# Altium PCB RXTX42_ver.0.0.PcbDoc
Units mm, origin at the board's own origin, x right, y up, seen from the top; angles counter-clockwise.
Board outline 50 x 75 mm, 8 copper layers (Top Layer, Int1 (Sign), Int2 (GND), Int3 (Sign), Int4 (Sign), Int5 (PWR), Int6 (Sign), Bottom Layer), stack 1.598 mm thick; 181 components, 144 nets, 699 pads, 127 vias.
Unrouted connection lines stored in the file: 446.
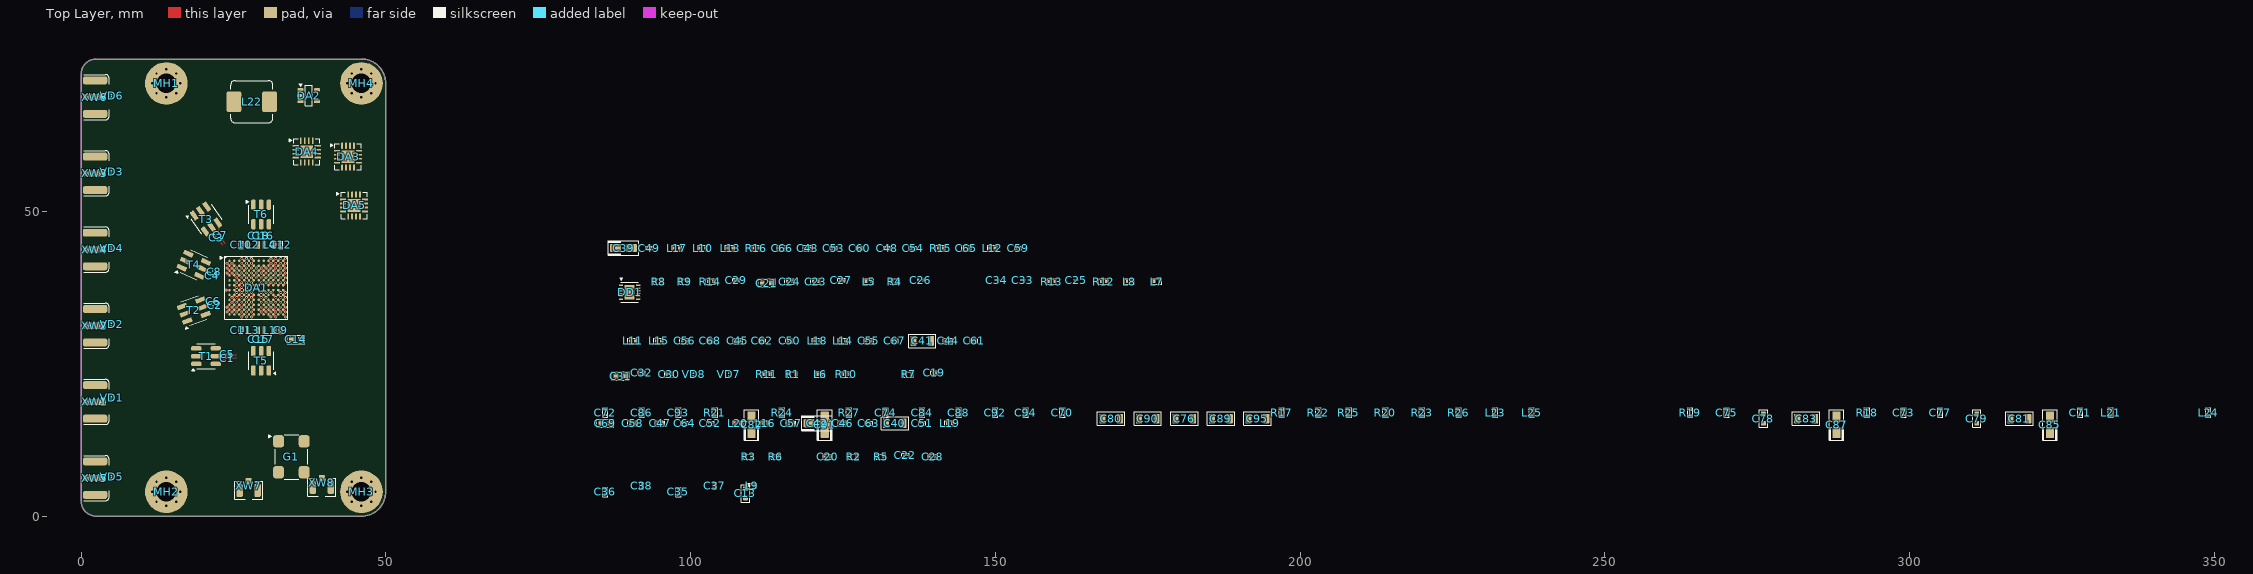
[diagram p0: Top Layer view]
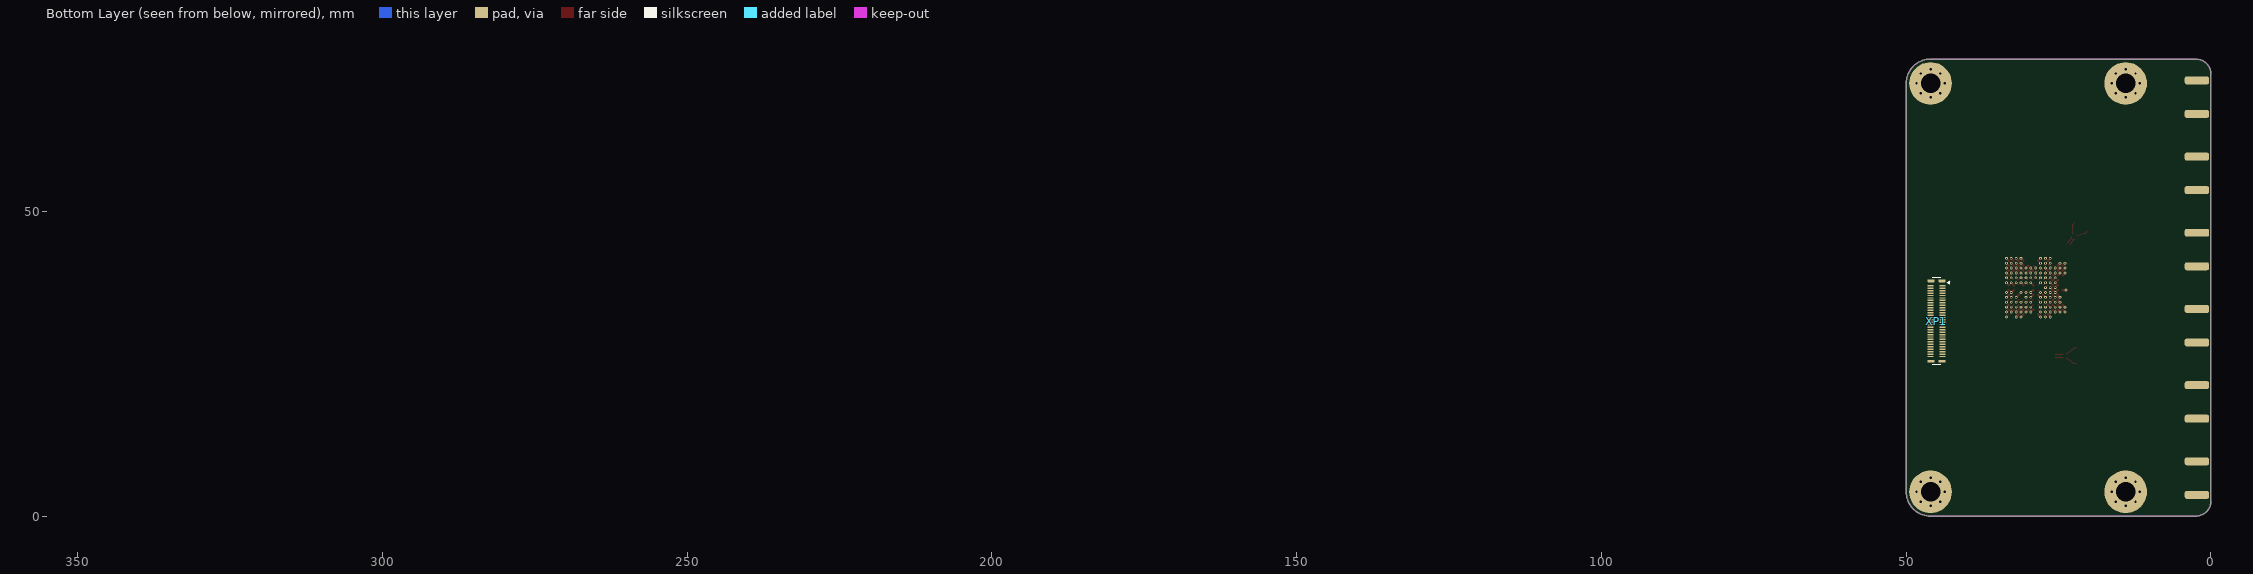
[diagram p1: Bottom Layer view, seen from below]

## Layer stack, top to bottom
Top Solder: solder mask 0.025, SM-001, Dk 3.5
Top Layer: signal copper 0.045
Dielectric 1: prepreg 0.125, PP-006, Dk 3.9
Int1 (Sign): signal copper 0.018
Dielectric 3: core 0.3, Core-027, Dk 4.2
Int2 (GND): signal copper 0.018
Dielectric 5: prepreg 0.125, PP-006, Dk 4.1
Int3 (Sign): signal copper 0.018
Dielectric 6: core 0.3, Core-027, Dk 4.2
Int4 (Sign): signal copper 0.018
Dielectric 7: prepreg 0.125, PP-006, Dk 4.1
Int5 (PWR): signal copper 0.018
Dielectric 9: core 0.3, Core-027, Dk 4.2
Int6 (Sign): signal copper 0.018
Dielectric 11: prepreg 0.125, PP-006, Dk 3.9
Bottom Layer: signal copper 0.045
Bottom Solder: solder mask 0.025, SM-001, Dk 3.5

## Board outline
-0.004,2.504 -0.004,72.5 cw(c2.496,72.5) 2.496,75 45.996,75 cw(c45.996,71) 49.996,71 49.996,4 cw(c45.996,4) 45.996,0 2.5,0 cw(c2.5,2.504)

## Design rules (kind name [scope] priority, off if disabled: settings)
BoardOutlineClearance [All] p1: gap=0.5 ignorepadtopadclearanceinfootprint=FALSE
Clearance [All] p1: gap=0.1 ignorepadtopadclearanceinfootprint=FALSE except(0.2: Arc-Hole Track-Hole SMDPad-Hole THPad-Hole Via-Hole Fill-Hole Poly-Hole Region-Hole Text-Hole)
DiffPairsRouting DiffPairsRouting_D100R [InDifferentialPairClass('D100R')] p1: maxlimit=0.254 minlimit=0.127 mostfreqgap=0.254 toplayer_mingap=0.25 toplayer_maxgap=0.25 toplayer_prefgap=0.25 toplayer_minwidth=0.2 toplayer_maxwidth=0.2 toplayer_prefwidth=0.2 midlayer1_maxgap=0.127 midlayer1_prefgap=0.127 midlayer1_minwidth=0.094 midlayer1_maxwidth=0.094 midlayer1_prefwidth=0.094 midlayer2_maxgap=0.127 midlayer2_prefgap=0.127 midlayer2_minwidth=0.09 midlayer2_maxwidth=0.09 midlayer2_prefwidth=0.09 midlayer3_maxgap=0.127 midlayer3_prefgap=0.127 midlayer3_minwidth=0.09 midlayer3_maxwidth=0.09 midlayer3_prefwidth=0.09 midlayer4_maxgap=0.127 midlayer4_prefgap=0.127 midlayer4_minwidth=0.094 midlayer4_maxwidth=0.094 midlayer4_prefwidth=0.094 bottomlayer_mingap=0.25 bottomlayer_maxgap=0.25 bottomlayer_prefgap=0.25 bottomlayer_minwidth=0.2 bottomlayer_maxwidth=0.2 bottomlayer_prefwidth=0.2 impedanceprofiledriven=TRUE impedanceprofileid={1991C7B2-119B-427F-9B3B-41121354F150} impedanceprofilevalue=100.000000 maxuncoupledlength=12.7
PolygonConnect [All] p1: connectstyle=Relief reliefconductorwidth=0.254 reliefentries=4 polygonreliefangle="90 Angle" airgapwidth=0.254
RoutingVias [All] p1: holewidth=0.2 width=0.45 viastyle="Through Hole" minholewidth=0.2 minwidth=0.45 maxholewidth=0.2 maxwidth=0.45
SolderMaskExpansion SolderMaskExpansion_Via [IsVia] p1: expansion=0.102 istentingtop=TRUE
SolderMaskExpansion [All] p2: expansion=0.05 istentingtop=FALSE
Width Width_SC50R [InNetClass('RX') or InNetClass('TX')] p1: maxlimit=1 minlimit=0.125 preferedwidth=0.125 toplayer_minwidth=1 toplayer_prefwidth=1 midlayer1_minwidth=0.129 midlayer1_maxwidth=0.129 midlayer1_prefwidth=0.129 midlayer2_maxwidth=0.125 midlayer3_maxwidth=0.125 midlayer4_minwidth=0.129 midlayer4_maxwidth=0.129 midlayer4_prefwidth=0.129 midlayer5_maxwidth=0.125 midlayer6_maxwidth=0.125 bottomlayer_minwidth=1 bottomlayer_prefwidth=1 impedanceprofiledriven=TRUE impedanceprofileid={81B1EE76-4853-4AD2-9444-194ED3106A19} impedanceprofilevalue=50.000000 minimp=50.000000 maximp=50.000000 favimp=50.000000
Width [All] p2: maxlimit=10 minlimit=0.1 preferedwidth=0.15
29 further rules are at their usual default settings.

## Classes and differential pairs
net class RX: RX1_A RX1_B RX2_A RX2_B
net class TX: TX1_A TX2_A
net class TX_DATA: FB_CLK TX_D0 TX_D1 TX_D2 TX_D3 TX_D4 TX_D5 TX_D6 TX_D7 TX_D8 TX_D9 TX_D10 TX_D11 TX_FRAME
net class RX_DATA: DATA_CLK RX_D0 RX_D1 RX_D2 RX_D3 RX_D4 RX_D5 RX_D6 RX_D7 RX_D8 RX_D9 RX_D10 RX_D11 RX_FRAME
net class PWR: 1.3V_TX 1.3V_TX1B 1.3V_TX2B 1.3V_VDDA_BB 1.3V_VDDA_DIG 1.3V_VDDA_MISC 1.3V_VDDA_OSC 1.3V_VDDA_RX_LO 1.3V_VDDA_RX_SYNTH 1.3V_VDDA_RX_TX 1.3V_VDDA_RX_VCO 1.3V_VDDA_TX_LO 1.3V_VDDA_TX_SYNTH 1.3V_VDDA_TX_VCO 1.8V 1.8V_VDD_INTERFACE 3.3V_VDD_GPO
net class CTRL_OUT: CTRL_OUT0 CTRL_OUT1 CTRL_OUT2 CTRL_OUT3 CTRL_OUT4 CTRL_OUT5 CTRL_OUT6 CTRL_OUT7
net class CTRL_IN: CTRL_IN0 CTRL_IN1 CTRL_IN2 CTRL_IN3
component class Э3-2: C39 C40 C41 C42 C43 C44 C45 C46 C47 C48 C49 C50 C51 C52 C53 C54 C55 C56 C57 C58 C59 C60 C61 C62 C63 C64 C65 C66 C67 C68 C69 C70 C71 C72 C73 C74 C75 C76 C77 C78 C79 C80 C81 C82 C83 C84 C85 C86 C87 C88 C89 C90 C91 C92 C93 C94 C95 DA2 DA3 DA4 DA5 L11 L12 L13 L14 L15 L16 L17 L18 L19 L20 L21 L22 L23 L24 L25 MH1 MH2 MH3 MH4 R15 R16 R17 R18 R19 R20 R21 R22 R23 R24 R25 R26 R27 XP1
differential pair class D100R: RX1_A_AC RX1_A_DC RX1_B_AC RX1_B_DC RX2_A_AC RX2_A_DC RX2_B_AC RX2_B_DC RX_FRAME TX1_A_AC TX1_A_DC TX2_A_AC TX2_A_DC TX_FRAME
component class Э3-1: C1 C2 C3 C4 C5 C6 C7 C8 C9 C10 C11 C12 C13 C14 C15 C16 C17 C18 C19 C20 C21 C22 C23 C24 C25 C26 C27 C28 C29 C30 C31 C32 C33 C34 C35 C36 C37 C38 DA1 DD1 G1 L1 L2 L3 L4 L5 L6 L7 L8 L9 L10 R1 R2 R3 R4 R5 R6 R7 R8 R9 R10 R11 R12 R13 R14 T1 T2 T3 T4 T5 T6 VD1 VD2 VD3 VD4 VD5 VD6 VD7 VD8 XW1 XW2 XW3 XW4 XW5 XW6 XW7 XW8
differential pair TX2_A_DC: +TX2_A_DC_P -TX2_A_DC_N
differential pair TX2_A_AC: +TX2_A_AC_P -TX2_A_AC_N
differential pair TX1_A_DC: +TX1_A_DC_P -TX1_A_DC_N
differential pair TX1_A_AC: +TX1_A_AC_P -TX1_A_AC_N
differential pair RX2_B_DC: +RX2_B_DC_P -RX2_B_DC_N
differential pair RX2_B_AC: +RX2_B_AC_P -RX2_B_AC_N
differential pair RX2_A_DC: +RX2_A_DC_P -RX2_A_DC_N
differential pair RX2_A_AC: +RX2_A_AC_P -RX2_A_AC_N
differential pair RX1_B_DC: +RX1_B_DC_P -RX1_B_DC_N
differential pair RX1_B_AC: +RX1_B_AC_P -RX1_B_AC_N
differential pair RX1_A_DC: +RX1_A_DC_P -RX1_A_DC_N
differential pair RX1_A_AC: +RX1_A_AC_P -RX1_A_AC_N

## Components (designator, comment, footprint, x,y, rotation, side; value= is the part's Value field where it differs from the comment)
C1 "" C0201-B-0.3mm-NO 24,25.95 r0 top value=18
C2 "" C0201-B-0.3mm-NO 21.917,34.595 r20 top value=18
C3 "" C0201-B-0.3mm-NO 22.2,45.668 r305 top value=18
C4 "" C0201-B-0.3mm-NO 21.514,39.431 r335 top value=18
C5 "" C0201-B-0.3mm-NO 24,26.55 r0 top value=18
C6 "" C0201-B-0.3mm-NO 21.661,35.299 r20 top value=18
C7 "" C0201-B-0.3mm-NO 22.815,46.098 r305 top value=18
C8 "" C0201-B-0.3mm-NO 21.831,40.111 r335 top value=18
C9 "" C0201-B-0.3mm 32.8,30.5 r270 top value=1000
C10 "" C0201-B-0.3mm 26.3,44.5 r90 top value=1000
C11 "" C0201-B-0.3mm 26.3,30.5 r270 top value=1000
C12 "" C0201-B-0.3mm 32.8,44.5 r90 top value=1000
C13 "" C0603-B-0.8mm 108.999,3.749 r90 top value="10 мкФ"
C14 "" C0603-B-0.8mm 35.25,29 r180 top value="10 мкФ"
C15 "" C0201-B-0.3mm-NO 29.175,29 r90 top value=18
C16 "" C0201-B-0.3mm-NO 29.925,46 r270 top value=18
C17 "" C0201-B-0.3mm-NO 29.925,29 r90 top value=18
C18 "" C0201-B-0.3mm-NO 29.175,46 r270 top value=18
C19 "" C0201-B-0.3mm 139.999,23.499 r0 top value="0,01 мкФ"
C20 "" C0402-B-0.5mm 122.499,9.749 r0 top value="0,1 мкФ"
C21 "" C0603-B-0.8mm 112.499,38.249 r0 top value="10 мкФ"
C22 "" C0201-B-0.3mm 135.249,9.999 r0 top value="0,01 мкФ"
C23 "" C0402-B-0.5mm 120.499,38.499 r0 top value="0,1 мкФ"
C24 "" C0402-B-0.5mm 116.249,38.499 r0 top value="0,1 мкФ"
C25 "" C0201-B-0.3mm-NO 163.249,38.749 r0 top value=1000
C26 "" C0402-B-0.5mm-NO 137.749,38.749 r0 top value=47
C27 "" C0201-B-0.3mm 124.749,38.749 r0 top value=18
C28 "" C0402-B-0.5mm 139.749,9.749 r0 top value="0,1 мкФ"
C29 "" C0201-B-0.3mm 107.499,38.749 r0 top value=18
C30 "" C0402-B-0.5mm 96.499,23.249 r0 top value="0,1 мкФ"
C31 "" C0603-B-0.8mm 88.499,22.999 r0 top value="10 мкФ"
C32 "" C0201-B-0.3mm 91.999,23.499 r0 top value="0,01 мкФ"
C33 "" C0201-B-0.3mm-NO 154.499,38.749 r0 top value="0,1 мкФ"
C34 "" C0201-B-0.3mm-NO 150.249,38.749 r0 top value="0,1 мкФ"
C35 "" C0402-B-0.5mm 98,4 r90 top value="1 мкФ"
C36 "" C0402-B-0.5mm 86,4 r90 top value="1 мкФ"
C37 "" C0201-B-0.3mm 104,5 r90 top value="0,01 мкФ"
C38 "" C0201-B-0.3mm 92,5 r90 top value="0,01 мкФ"
C39 "" TL-A-B-1.8MM 88.999,43.999 r0 top value="47 мкФ"
C40 "" C1206-B-1.6mm 133.499,15.249 r0 top value="100 мкФ"
C41 "" C1206-B-1.6mm 137.999,28.749 r0 top value="100 мкФ"
C42 "" TL-A-B-1.8MM 120.749,15.249 r0 top value="47 мкФ"
C43 "" C0402-B-0.5mm 119.249,43.999 r0 top value="1 мкФ"
C44 "" C0402-B-0.5mm 142.249,28.749 r0 top value="1 мкФ"
C45 "" C0402-B-0.5mm 107.749,28.749 r0 top value="1 мкФ"
C46 "" C0402-B-0.5mm 124.999,15.249 r0 top value="1 мкФ"
C47 "" C0402-B-0.5mm 94.999,15.249 r0 top value="1 мкФ"
C48 "" C0201-B-0.3mm 132.249,43.999 r0 top value="0,01 мкФ"
C49 "" C0201-B-0.3mm 93.249,43.999 r0 top value="0,01 мкФ"
C50 "" C0201-B-0.3mm 116.249,28.749 r0 top value="0,01 мкФ"
C51 "" C0201-B-0.3mm 137.999,15.249 r0 top value="0,01 мкФ"
C52 "" C0201-B-0.3mm 103.249,15.249 r0 top value="0,01 мкФ"
C53 "" C0201-B-0.3mm 123.499,43.999 r0 top value="0,01 мкФ"
C54 "" C0201-B-0.3mm 136.499,43.999 r0 top value="0,01 мкФ"
C55 "" C0402-B-0.5mm 129.249,28.749 r0 top value="1 мкФ"
C56 "" C0402-B-0.5mm 98.999,28.749 r0 top value="1 мкФ"
C57 "" C0402-B-0.5mm 116.499,15.249 r0 top value="1 мкФ"
C58 "" C0402-B-0.5mm 90.499,15.249 r0 top value="1 мкФ"
C59 "" C0201-B-0.3mm 153.749,43.999 r0 top value=1000
C60 "" C0201-B-0.3mm 127.749,43.999 r0 top value=1000
C61 "" C0201-B-0.3mm 146.499,28.749 r0 top value="0,01 мкФ"
C62 "" C0201-B-0.3mm 111.749,28.749 r0 top value="0,01 мкФ"
C63 "" C0201-B-0.3mm 129.249,15.249 r0 top value="0,01 мкФ"
C64 "" C0201-B-0.3mm 98.999,15.249 r0 top value="0,01 мкФ"
C65 "" C0402-B-0.5mm 145.249,43.999 r0 top value="1 мкФ"
C66 "" C0402-B-0.5mm 114.999,43.999 r0 top value="1 мкФ"
C67 "" C0201-B-0.3mm 133.499,28.749 r0 top value="0,01 мкФ"
C68 "" C0201-B-0.3mm 103.249,28.749 r0 top value="0,01 мкФ"
C69 "" C0603-B-0.8mm 85.999,15.249 r0 top value="10 мкФ"
C70 "" C0402-B-0.5mm 161,17 r90 top value="0,1 мкФ"
C71 "" C0402-B-0.5mm 328,17 r90 top value="0,1 мкФ"
C72 "" C0402-B-0.5mm 86,17 r90 top value="0,1 мкФ"
C73 "" C0402-B-0.5mm 299,17 r90 top value="0,1 мкФ"
C74 "" C0402-B-0.5mm 132,17 r90 top value="0,1 мкФ"
C75 "" C0402-B-0.5mm 270,17 r90 top value="0,1 мкФ"
C76 "" C1206-B-1.6mm 181,16 r0 top value="100 мкФ"
C77 "" C0402-B-0.5mm 305,17 r90 top value="0,1 мкФ"
C78 "" C0603-B-0.8mm 276,16 r90 top value="10 мкФ"
C79 "" C0603-B-0.8mm 311,16 r90 top value="10 мкФ"
C80 "" C1206-B-1.6mm 169,16 r0 top value="100 мкФ"
C81 "" C1206-B-1.6mm 318,16 r0 top value="100 мкФ"
C82 "" TL-A-B-1.8MM 110,15 r90 top value="47 мкФ"
C83 "" C1206-B-1.6mm 283,16 r0 top value="100 мкФ"
C84 "" C0402-B-0.5mm 138,17 r90 top value="0,1 мкФ"
C85 "" TL-A-B-1.8MM 323,15 r90 top value="47 мкФ"
C86 "" C0402-B-0.5mm 92,17 r90 top value="0,1 мкФ"
C87 "" TL-A-B-1.8MM 288,15 r90 top value="47 мкФ"
C88 "" C0402-B-0.5mm 144,17 r90 top value="0,1 мкФ"
C89 "" C1206-B-1.6mm 187,16 r0 top value="100 мкФ"
C90 "" C1206-B-1.6mm 175,16 r0 top value="100 мкФ"
C91 "" TL-A-B-1.8MM 122,15 r90 top value="47 мкФ"
C92 "" C0402-B-0.5mm 150,17 r90 top value="0,1 мкФ"
C93 "" C0402-B-0.5mm 98,17 r90 top value="0,1 мкФ"
C94 "" C0402-B-0.5mm 155,17 r90 top value="0,1 мкФ"
C95 "" C1206-B-1.6mm 193,16 r0 top value="100 мкФ"
DA1 "AD9363BBCZ" 144-BGA 28.75,37.5 r0 top locked
DA2 "TLV62569DBVR" SOT-23-5 37.35,69 r0 top
DA3 "ADP1755ACPZ-R7" 16-LFCSP-4-H0.75 43.8,58.975 r0 top
DA4 "ADP1755ACPZ-R7" 16-LFCSP-4-H0.75 37.025,59.8 r0 top
DA5 "ADP1755ACPZ-R7" 16-LFCSP-4-H0.75 44.8,50.975 r0 top
DD1 "LTC6957IDD-3" 12-DFN 89.999,36.749 r0 top
G1 "SG-710ECK 40.0000" "Generator 7x5x1.3" 34.5,9.75 r0 top
L1 "" LCL0805-C-1.2mm-NO 30.925,30.5 r0 top value="330 нГн"
L2 "" LCL0805-C-1.2mm-NO 28.175,44.5 r180 top value="330 нГн"
L3 "" LCL0805-C-1.2mm-NO 28.175,30.5 r180 top value="330 нГн"
L4 "" LCL0805-C-1.2mm-NO 30.925,44.5 r0 top value="330 нГн"
L5 "" L0402-B-0.5mm 129.249,38.499 r0 top value="3,4 кОм (500 МГц)"
L6 "" L0402-B-0.5mm 121.249,23.249 r0 top value="3,4 кОм (500 МГц)"
L7 "" L0402-B-0.5mm 176.499,38.499 r0 top value="3,4 кОм (500 МГц)"
L8 "" L0402-B-0.5mm 171.999,38.499 r0 top value="3,4 кОм (500 МГц)"
L9 "" L0402-B-0.5mm 110,5 r0 top value="3,4 кОм (500 МГц)"
L10 "" L0402-B-0.5mm 101.999,43.999 r0 top value="3,4 кОм (500 МГц)"
L11 "" L0402-B-0.5mm 90.499,28.749 r0 top value="3,4 кОм (500 МГц)"
L12 "" L0402-B-0.5mm 149.499,43.999 r0 top value="3,4 кОм (500 МГц)"
L13 "" L0402-B-0.5mm 106.499,43.999 r0 top value="3,4 кОм (500 МГц)"
L14 "" L0402-B-0.5mm 124.999,28.749 r0 top value="3,4 кОм (500 МГц)"
L15 "" L0402-B-0.5mm 94.749,28.749 r0 top value="3,4 кОм (500 МГц)"
L16 "" L0402-B-0.5mm 112.249,15.249 r0 top value="3,4 кОм (500 МГц)"
L17 "" L0402-B-0.5mm 97.749,43.999 r0 top value="3,4 кОм (500 МГц)"
L18 "" L0402-B-0.5mm 120.749,28.749 r0 top value="3,4 кОм (500 МГц)"
L19 "" L0402-B-0.5mm 142.499,15.249 r0 top value="3,4 кОм (500 МГц)"
L20 "" L0402-B-0.5mm 107.749,15.249 r0 top value="3,4 кОм (500 МГц)"
L21 "" L0402-B-0.5mm 333,17 r90 top value="3,4 кОм (500 МГц)"
L22 "" IHLP-2525CZ-01 28,68 r0 top value="10 мкГн"
L23 "" L0402-B-0.5mm 232,17 r90 top value="3,4 кОм (500 МГц)"
L24 "" L0402-B-0.5mm 349,17 r90 top value="3,4 кОм (500 МГц)"
L25 "" L0402-B-0.5mm 238,17 r90 top value="3,4 кОм (500 МГц)"
MH1 "Mechanical Connection" "Отверстие 3,2х7" 14,71 r0 top
MH2 "Mechanical Connection" "Отверстие 3,2х7" 14,4 r0 top
MH3 "Mechanical Connection" "Отверстие 3,2х7" 46,4 r0 top
MH4 "Mechanical Connection" "Отверстие 3,2х7" 46,71 r0 top
R1 "" CR0402-B-0.35mm 116.749,23.249 r0 top value=49,9
R2 "" CR0402-B-0.35mm 126.749,9.749 r0 top value=0
R3 "" CR0402-B-0.35mm 109.499,9.749 r0 top value=0
R4 "" CR0402-B-0.35mm 133.499,38.499 r0 top value=0
R5 "" CR0402-B-0.35mm 131.249,9.749 r0 top value=0
R6 "" CR0402-B-0.35mm 113.999,9.749 r0 top value=0
R7 "" CR0402-B-0.35mm 135.749,23.249 r0 top value=0
R8 "" CR0402-B-0.35mm 94.749,38.499 r0 top value=240
R9 "" CR0402-B-0.35mm 98.999,38.499 r0 top value=240
R10 "" CR0402-B-0.35mm 125.499,23.249 r0 top value=75
R11 "" CR0402-B-0.35mm 112.499,23.249 r0 top value=100
R12 "" CR0402-B-0.35mm 167.749,38.499 r0 top value=0
R13 "" CR0402-B-0.35mm 159.249,38.499 r0 top value=0
R14 "" CR0402-B-0.35mm 103.249,38.499 r0 top value="14,3 кОм"
R15 "" CR0402-B-0.35mm 140.999,43.999 r0 top value=1
R16 "" CR0402-B-0.35mm 110.749,43.999 r0 top value=1
R17 "" CR0402-B-0.35mm 197,17 r90 top value=100
R18 "" CR0402-B-0.35mm 293,17 r90 top value=100
R19 "" CR0402-B-0.35mm 264,17 r90 top value=100
R20 "" CR0402-B-0.35mm 214,17 r90 top value=100
R21 "" CR0402-B-0.35mm 104,17 r90 top value=100
R22 "" CR0402-B-0.35mm 203,17 r90 top value=100
R23 "" CR0402-B-0.35mm 220,17 r90 top value=100
R24 "" CR0402-B-0.35mm 115,17 r90 top value=100
R25 "" CR0402-B-0.35mm 208,17 r90 top value=100
R26 "" CR0402-B-0.35mm 226,17 r90 top value=100
R27 "" CR0402-B-0.35mm 126,17 r90 top value=100
T1 "TCM1-63AX+" TCM1-63AX+ 20.5,26.25 r90 top
T2 "TCM1-63AX+" TCM1-63AX+ 18.5,33.75 r110 top
T3 "TCM1-63AX+" TCM1-63AX+ 20.5,48.75 r35 top
T4 "TCM1-63AX+" TCM1-63AX+ 18.5,41.25 r65 top
T5 "TCM1-63AX+" TCM1-63AX+ 29.55,25.5 r180 top
T6 "TCM1-63AX+" TCM1-63AX+ 29.55,49.5 r0 top
VD1 "" X3DFN2-NO 5,19.4 r90 top
VD2 "" X3DFN2-NO 5,31.475 r90 top
VD3 "" X3DFN2-NO 5,56.475 r90 top
VD4 "" X3DFN2-NO 5,43.975 r90 top
VD5 "" X3DFN2-NO 5,6.475 r90 top
VD6 "" X3DFN2-NO 5,68.975 r90 top
VD7 "" X3DFN2-NO 106.249,23.249 r90 top
VD8 "" X3DFN2-NO 100.499,23.249 r90 top
XP1 "*" AXT460324 45.025,32 r90 bottom
XW1 "XW(S)" SMA-J-P-H-ST-EM1 0,18.75 r90 top
XW2 "XW(S)" SMA-J-P-H-ST-EM1 0,31.25 r90 top
XW3 "XW(S)" SMA-J-P-H-ST-EM1 0,56.25 r90 top
XW4 "XW(S)" SMA-J-P-H-ST-EM1 0,43.75 r90 top
XW5 "XW(S)" SMA-J-P-H-ST-EM1 0,6.25 r90 top
XW6 "XW(S)" SMA-J-P-H-ST-EM1 0,68.75 r90 top
XW7 "XW(P)" "U.FL STR PLG" 27.5,4.25 r180 top
XW8 "XW(P)" "U.FL STR PLG" 39.5,4.75 r180 top

## Footprints (in the part's own frame and the unit in brackets; to place one, negate y for a bottom-side part, rotate by r counter-clockwise, add the part's x,y. Pads: shape width x height; smd on the part's side, far side on the other; paste and mask are expansions set on the pad)
12-DFN [mm] "Analog Devices Footprint"
  rrect50% 0.7x0.25 smd: 1(-1.4,1.125) 2(-1.4,0.675) 3(-1.4,0.225) 4(-1.4,-0.225) 5(-1.4,-0.675) 6(-1.4,-1.125) 7(1.4,-1.125) 8(1.4,-0.675) 9(1.4,-0.225) 10(1.4,0.225) 11(1.4,0.675) 12(1.4,1.125)
  rrect10% 1.65x2.4 smd: PAD(0,0)
  silkscreen extent -1.65,-1.65 1.45,2.38, body extent -1.5,-1.5 1.5,1.5, height 0.75
16-LFCSP-4-H0.75 [mm] "Analog Devices Footprint"
  rrect50% 1x0.3 smd: 1(-1.8,0.975) 2(-1.8,0.325) 3(-1.8,-0.325) 4(-1.8,-0.975) 9(1.8,-0.975) 10(1.8,-0.325) 11(1.8,0.325) 12(1.8,0.975)
  rrect50% 0.3x1 smd: 5(-0.975,-1.8) 6(-0.325,-1.8) 7(0.325,-1.8) 8(0.975,-1.8) 13(0.975,1.8) 14(0.325,1.8) 15(-0.325,1.8) 16(-0.975,1.8)
  rrect10% 2.1x2.1 smd: PAD(0,0)
  silkscreen extent -2.88,-2.15 2.15,2.15, body extent -2,-2 2,2, height 0.75
144-BGA [mm] "BC-144-7"
  round 0.4 smd: A1(-4.4,4.4) A2(-3.6,4.4) A3(-2.8,4.4) A4(-2,4.4) A5(-1.2,4.4) A6(-0.4,4.4) A7(0.4,4.4) A8(1.2,4.4) A9(2,4.4) A10(2.8,4.4) A11(3.6,4.4) A12(4.4,4.4) B1(-4.4,3.6) B2(-3.6,3.6) B3(-2.8,3.6) B4(-2,3.6) B5(-1.2,3.6) B6(-0.4,3.6) B7(0.4,3.6) B8(1.2,3.6) B9(2,3.6) B10(2.8,3.6) B11(3.6,3.6) B12(4.4,3.6) C1(-4.4,2.8) C2(-3.6,2.8) C3(-2.8,2.8) C4(-2,2.8) C5(-1.2,2.8) C6(-0.4,2.8) C7(0.4,2.8) C8(1.2,2.8) C9(2,2.8) C10(2.8,2.8) C11(3.6,2.8) C12(4.4,2.8) D1(-4.4,2) D2(-3.6,2) D3(-2.8,2) D4(-2,2) D5(-1.2,2) D6(-0.4,2) D7(0.4,2) D8(1.2,2) D9(2,2) D10(2.8,2) D11(3.6,2) D12(4.4,2) E1(-4.4,1.2) E2(-3.6,1.2) E3(-2.8,1.2) E4(-2,1.2) E5(-1.2,1.2) E6(-0.4,1.2) E7(0.4,1.2) E8(1.2,1.2) E9(2,1.2) E10(2.8,1.2) E11(3.6,1.2) E12(4.4,1.2) F1(-4.4,0.4) F2(-3.6,0.4) F3(-2.8,0.4) F4(-2,0.4) F5(-1.2,0.4) F6(-0.4,0.4) F7(0.4,0.4) F8(1.2,0.4) F9(2,0.4) F10(2.8,0.4) F11(3.6,0.4) F12(4.4,0.4) G1(-4.4,-0.4) G2(-3.6,-0.4) G3(-2.8,-0.4) G4(-2,-0.4) G5(-1.2,-0.4) G6(-0.4,-0.4) G7(0.4,-0.4) G8(1.2,-0.4) G9(2,-0.4) G10(2.8,-0.4) G11(3.6,-0.4) G12(4.4,-0.4) H1(-4.4,-1.2) H2(-3.6,-1.2) H3(-2.8,-1.2) H4(-2,-1.2) H5(-1.2,-1.2) H6(-0.4,-1.2) H7(0.4,-1.2) H8(1.2,-1.2) H9(2,-1.2) H10(2.8,-1.2) H11(3.6,-1.2) H12(4.4,-1.2) J1(-4.4,-2) J2(-3.6,-2) J3(-2.8,-2) J4(-2,-2) J5(-1.2,-2) J6(-0.4,-2) J7(0.4,-2) J8(1.2,-2) J9(2,-2) J10(2.8,-2) J11(3.6,-2) J12(4.4,-2) K1(-4.4,-2.8) K2(-3.6,-2.8) K3(-2.8,-2.8) K4(-2,-2.8) K5(-1.2,-2.8) K6(-0.4,-2.8) K7(0.4,-2.8) K8(1.2,-2.8) K9(2,-2.8) K10(2.8,-2.8) K11(3.6,-2.8) K12(4.4,-2.8) L1(-4.4,-3.6) L2(-3.6,-3.6) L3(-2.8,-3.6) L4(-2,-3.6) L5(-1.2,-3.6) L6(-0.4,-3.6) L7(0.4,-3.6) L8(1.2,-3.6) L9(2,-3.6) L10(2.8,-3.6) L11(3.6,-3.6) L12(4.4,-3.6) M1(-4.4,-4.4) M2(-3.6,-4.4) M3(-2.8,-4.4) M4(-2,-4.4) M5(-1.2,-4.4) M6(-0.4,-4.4) M7(0.4,-4.4) M8(1.2,-4.4) M9(2,-4.4) M10(2.8,-4.4) M11(3.6,-4.4) M12(4.4,-4.4)
  silkscreen extent -5.87,-5.15 5.15,5.15, body extent -5,-5 5,5, height 1.7
AXT460324 [mm] "Panasonic"
  rrect50% 0.23x1 smd: 1(5.8,-0.975) 2(5.8,0.975) 3(5.4,-0.975) 4(5.4,0.975) 5(5,-0.975) 6(5,0.975) 7(4.6,-0.975) 8(4.6,0.975) 9(4.2,-0.975) 10(4.2,0.975) 11(3.8,-0.975) 12(3.8,0.975) 13(3.4,-0.975) 14(3.4,0.975) 15(3,-0.975) 16(3,0.975) 17(2.6,-0.975) 18(2.6,0.975) 19(2.2,-0.975) 20(2.2,0.975) 21(1.8,-0.975) 22(1.8,0.975) 23(1.4,-0.975) 24(1.4,0.975) 25(1,-0.975) 26(1,0.975) 27(0.6,-0.975) 28(0.6,0.975) 29(0.2,-0.975) 30(0.2,0.975) 31(-0.2,-0.975) 32(-0.2,0.975) 33(-0.6,-0.975) 34(-0.6,0.975) 35(-1,-0.975) 36(-1,0.975) 37(-1.4,-0.975) 38(-1.4,0.975) 39(-1.8,-0.975) 40(-1.8,0.975) 41(-2.2,-0.975) 42(-2.2,0.975) 43(-2.6,-0.975) 44(-2.6,0.975) 45(-3,-0.975) 46(-3,0.975) 47(-3.4,-0.975) 48(-3.4,0.975) 49(-3.8,-0.975) 50(-3.8,0.975) 51(-4.2,-0.975) 52(-4.2,0.975) 53(-4.6,-0.975) 54(-4.6,0.975) 55(-5,-0.975) 56(-5,0.975) 57(-5.4,-0.975) 58(-5.4,0.975) 59(-5.8,-0.975) 60(-5.8,0.975)
  rrect50% 0.45x1.15 smd: SHLD(-6.6,-0.9) SHLD(-6.6,0.9) SHLD(6.6,-0.9) SHLD(6.6,0.9)
  silkscreen extent -7.12,-2.15 7.12,0.7, body extent -6.95,-1.17 6.95,1.18, height 2.24
C0201-B-0.3mm [mm] "MURATA Footprint"
  rrect25% 0.3x0.3 smd mask+0.05: 1(-0.275,0) 2(0.275,0)
  silkscreen extent -0.6,-0.33 0.6,0.33, body extent -0.3,-0.15 0.3,0.15, height 0.3
C0201-B-0.3mm-NO [mm] "MURATA Footprint No Overlay"
  rrect25% 0.3x0.3 smd mask+0.05: 1(-0.275,0) 2(0.275,0)
  body extent -0.3,-0.15 0.3,0.15, height 0.3
C0402-B-0.5mm [mm] "MURATA Footprint"
  rrect25% 0.4x0.5 smd mask+0.05: 1(-0.4,0) 2(0.4,0)
  silkscreen extent -0.77,-0.43 0.77,0.43, body extent -0.5,-0.25 0.5,0.25, height 0.5
C0402-B-0.5mm-NO [mm] "MURATA Footprint No Overlay"
  rrect25% 0.4x0.5 smd mask+0.05: 1(-0.4,0) 2(0.4,0)
  body extent -0.5,-0.25 0.5,0.25, height 0.5
C0603-B-0.8mm [mm] "MURATA Footprint"
  rrect25% 0.8x0.8 smd: 1(-0.75,0) 2(0.75,0)
  silkscreen extent -1.43,-0.67 1.43,0.67, body extent -0.8,-0.4 0.8,0.4, height 0.8
C1206-B-1.6mm [mm] "MURATA Footprint"
  rrect25% 1x1.6 smd: 1(-1.45,0) 2(1.45,0)
  silkscreen extent -2.25,-1.1 2.25,1.1, body extent -1.6,-0.8 1.6,0.8, height 1.6
CR0402-B-0.35mm [mm] "BOURNS Footprint"
  rrect25% 0.35x0.5 smd mask+0.05: 1(-0.425,0) 2(0.425,0)
  silkscreen extent -0.77,-0.43 0.77,0.43, body extent -0.5,-0.25 0.5,0.25, height 0.37
"Generator 7x5x1.3" [mm] "EPSON Footprint"
  rrect50% 1.8x2 smd: 1(-2.1,2.54) 2(-2.1,-2.54) 3(2.1,-2.54) 4(2.1,2.54)
  silkscreen extent -3.68,-3.65 2.65,3.65, body extent -2.5,-3.5 2.5,3.5, height 1.3
IHLP-2525CZ-01 [mm] "Vishay"
  rrect25% 2.41x3.43 smd: 1(-2.92,0) 2(2.92,0)
  silkscreen extent -3.47,-3.47 3.47,3.47, body extent -3.54,-3.33 3.53,3.34, height 2.89
L0402-B-0.5mm [mm] "CHILISIN Footprint"
  rrect25% 0.4x0.5 smd mask+0.05: 1(-0.4,0) 2(0.4,0)
  silkscreen extent -0.77,-0.43 0.77,0.43, body extent -0.5,-0.25 0.5,0.25, height 0.5
LCL0805-C-1.2mm-NO [mm] "No Overlay"
  rrect25% 0.55x1.25 smd: 1(-0.875,0) 2(0.875,0)
  body extent -1,-0.62 1,0.62, height 1.2
SMA-J-P-H-ST-EM1 [mm] "SAMTEC"
  rrect50% 1x3.8 smd: 1(0,-2.2)
  rrect50% 1.3x4 smd: 2(-2.75,-2.3) 2(2.75,-2.3)
  rrect50% 1.3x4 smd far side: 2(-2.75,-2.3) 2(2.75,-2.3)
  silkscreen extent -3.7,-4.6 3.7,-0.4, body extent -3.17,-3.81 3.18,9.52, height 3.81
SOT-23-5 [mm] "TI 5-pin Case"
  rrect50% 1x0.55 smd: 1(-1.35,0.95) 2(-1.35,0) 3(-1.35,-0.95) 4(1.35,-0.95) 6(1.35,0.95)
  silkscreen extent -1.6,-1.7 0.55,1.95, body extent -1.4,-1.55 1.4,1.55, height 1.45
TCM1-63AX+ [mm] "Mini-Circuits Fooprint"
  rrect50% 0.75x1.65 smd: 1(-1.27,1.6) 2(0,1.6) 3(1.27,1.6) 4(1.27,-1.6) 5(0,-1.6) 6(-1.27,-1.6)
  silkscreen extent -2.43,-1.5 2.05,2.32, body extent -1.9,-2.03 1.91,2.03, height 4.06
TL-A-B-1.8MM [mm] "Tantal A 3.2x1.6x1.8"
  rrect25% 1.8x1.35 smd: 1(-1.3,0) 2(1.3,0)
  silkscreen extent -2.5,-1.2 2.5,1.2, body extent -1.7,-0.9 1.7,0.9, height 1.8
"U.FL STR PLG" [mm] "Straight Receptacle"
  rrect50% 1x1.05 smd: 1(0,-1.525)
  rrect50% 1.05x2.2 smd: 2(-1.475,0) 2(1.475,0)
  Top Layer pour cut-out: -0.95,0.8 -0.927,0.915 -0.862,1.012 -0.765,1.077 -0.65,1.1 -0.65,1.1 0.65,1.1 0.765,1.077 0.862,1.012 0.927,0.915 0.95,0.8 0.95,0.8 0.95,-1.75 0.927,-1.865 0.862,-1.962 0.765,-2.027 0.65,-2.05 0.65,-2.05 -0.65,-2.05 -0.765,-2.027 -0.862,-1.962 -0.927,-1.865 -0.95,-1.75 -0.95,-1.75
  silkscreen extent -2.3,-1.45 2.3,1.45, body extent -1.5,-1.55 1.5,1.55, height 1.25
X3DFN2-NO [mm] "ON Semiconductor Footprint No Overlay"
  rrect50% 0.3x0.3 smd: 1(-0.225,0) 2(0.225,0)
  body extent -0.3,-0.15 0.3,0.15, height 0.3
"Отверстие 3,2х7" [mm]
  round 1 hole 0.4: 0(-2.3,0) 0(-1.626,-1.626) 0(-1.626,1.626) 0(0,-2.3) 0(0,2.3) 0(1.626,-1.626) 0(1.626,1.626) 0(2.3,0)
  round 7 / inner round 5 / far side round 7 hole 3.2: 0(0,0)

## Part data
C1 C2 C3 C4 C5 C6 C7 C8 C15 C16 C17 C18: library part "Non Polar Hor.", "0201 18 пФ ±5% 50 В C0G", PartNumber=GRM0335C1H180JA01D, TemperatureRange=-XX...+XX°C, ComponentType=CAP
C9 C10 C11 C12: library part "Non Polar Ver.", "0201 1000 пФ ±10% 16 В X7R", TemperatureRange=-XX...+XX°C, ComponentType=CAP
C13 C14 C21 C31 C69 C78 C79: library part "Non Polar Ver.", "0603 10 мкФ ±10% 16 В X7R", TemperatureRange=-XX...+XX°C, ComponentType=CAP
C19: library part "Non Polar Hor.", "0201 0,01 мкФ ±10% 16 В X7R", PartNumber=GRM0335C1H180JA01D, TemperatureRange=-XX...+XX°C, ComponentType=CAP
C20 C23 C24 C28 C30 C70 C71 C72 C73 C74 C75 C77 C84 C86 C88 C92 C93 C94: library part "Non Polar Ver.", "0402 0,1 мкФ ±10% 16 В X7R", TemperatureRange=-XX...+XX°C, ComponentType=CAP
C22 C32 C37 C38 C48 C49 C50 C51 C52 C53 C54 C61 C62 C63 C64 C67 C68: library part "Non Polar Ver.", "0201 0,01 мкФ ±10% 16 В X7R", TemperatureRange=-XX...+XX°C, ComponentType=CAP
C25 C59 C60: library part "Non Polar Hor.", "0201 1000 пФ ±10% 16 В X7R", TemperatureRange=-XX...+XX°C, ComponentType=CAP
C26: library part "Non Polar Hor.", "0402 47 пФ ±5% 50 В X7R", PartNumber=GRM0335C1H180JA01D, TemperatureRange=-XX...+XX°C, ComponentType=CAP
C27 C29: library part "Non Polar Ver.", "0201 18 пФ ±5% 50 В C0G", TemperatureRange=-XX...+XX°C, ComponentType=CAP
C33 C34: library part "Non Polar Hor.", "0201 0,1 мкФ ±10% 16 В X7R", TemperatureRange=-XX...+XX°C, ComponentType=CAP
C35 C36 C43 C44 C45 C46 C47 C55 C56 C57 C58: library part "Non Polar Ver.", "0402 1 мкФ ±10% 16 В X7R", TemperatureRange=-XX...+XX°C, ComponentType=CAP
C39 C42 C82 C85 C87 C91: library part "Polar Ver.", TemperatureRange=-XX...+XX°C, ComponentType=CAP
C40 C41 C76 C80 C81 C83 C89 C90 C95: library part "Non Polar Ver.", "1206 100 мкФ ±20% 6,3 В X5R", TemperatureRange=-XX...+XX°C, ComponentType=CAP
C65 C66: library part "Non Polar Hor.", "0402 1 мкФ ±10% 16 В X7R", TemperatureRange=-XX...+XX°C, ComponentType=CAP
DA1: library part AD9363, "RF Agile Transceiver", Manufacturer=AnalogDevices, TemperatureRange=-40...+85°C, ComponentType=RF, PartNumber=AD9363BBCZ, PinCount=144
DA2: library part TLV62569DBV, "2-A High Efficiency Synchronous Buck Converter in SOT Package", Manufacturer="Texas Instruments, Inc.", Package=SOT-23, TemperatureRange=-40...+85°C, ComponentType=IC, PartNumber=TLV62569DBVR, PinCount=6
DA3 DA4 DA5: "1.2 A, Ultralow Noise, / High PSRR, RF Linear Regulator", Manufacturer="Analog Devices, Inc.", Package=16-LFCSP_WQ, TemperatureRange=-40...+125°C, ComponentType=IC, PartNumber=ADP1755ACPZ-R7, PinCount=16
DD1: "Ultra-Small, Low-Power, I2C-Compatible, 860-SPS, 16-Bit ADCs With Internal Reference, Oscillator, and Programmable Comparator", Manufacturer=AnalogDevices, Package=12-DFN, TemperatureRange=-40...+85°C, ComponentType=IC, PartNumber=LTC6957IDD-3, PinCount=12
G1: library part Generator, TemperatureRange=-...+°C, Tolerance="± ppm", ComponentType=GEN, PartNumber="SG-710ECK 40.0000", PinCount=4
L1 L2 L3 L4: library part "Inductor Ver.", PartNumber=L-15WR33GV4E, TemperatureRange=-XX...+XX°C, ComponentType=IND, PinCount=2
L5 L6 L7 L8 L9 L10 L11 L12 L13 L14 L15 L16 L17 L18 L19 L20 L21 L23 L24 L25: library part "Inductor MC Hor.", PartNumber=BLM15HD182BH1, TemperatureRange=-XX...+XX°C, ComponentType=IND, PinCount=2
L22: library part "Inductor MC Hor.", PartNumber=IHLP2525CZER100M01, TemperatureRange=-XX...+XX°C, ComponentType=IND, PinCount=2
R1: library part "Resistor Ver.", "0402 49,9 Ом 1%", TemperatureRange=-XX...+XX°C, ComponentType=RES
R2 R3 R5 R6: library part "Resistor Ver.", "0402 0 Ом", TemperatureRange=-XX...+XX°C
  R2 R6: ComponentType=NI
  R3 R5: ComponentType=RES
R4 R7 R12 R13: library part "Resistor Hor.", "0402 0 Ом", TemperatureRange=-XX...+XX°C, ComponentType=RES
R8 R9: library part "Resistor Hor.", "0402 240 Ом ±1%", TemperatureRange=-XX...+XX°C, ComponentType=RES
R10: library part "Resistor Hor.", "0402 75 Ом ±1%", TemperatureRange=-XX...+XX°C, ComponentType=RES
R11 R17 R18 R19 R20 R21 R22 R23 R24 R25 R26 R27: library part "Resistor Ver.", "0402 100 Ом ±1%", TemperatureRange=-XX...+XX°C, ComponentType=RES
R14: library part "Resistor Ver.", "0402 14,3 кОм ±1%", TemperatureRange=-XX...+XX°C, ComponentType=RES
R15 R16: library part "Resistor Hor.", "0402 1 Ом ±1%", TemperatureRange=-XX...+XX°C, ComponentType=RES
T1 T2 T3 T4 T5 T6: TemperatureRange=-40...+85°C, ComponentType=TR, PartNumber=TCM1-63AX+, PinCount=6
VD1 VD2 VD3 VD4 VD5 VD6 VD7 VD8: library part "TVS Ver.", PartNumber=ESD8472MUT5G, Voltage="5,3 В", ComponentType=TVS
XP1: library part XP_60_SHLD_Pin_Open, TemperatureRange=-XX...+XX°C, ComponentType=Connector, PinCount=60
XW1 XW2 XW3 XW4 XW5 XW6 XW7 XW8: TemperatureRange=-XX...+XX°C, ComponentType=Connector, PinCount=2

## Via types
v1: diameter 0.45, hole 0.2, Top Layer to Bottom Layer, tented both sides, 127 vias

## Nets (pads, with @x,y where several pads share a name; then routed paths per layer and width w, separated by ;. In a path a pad name is that pad's centre, name@x,y a point inside that pad or via, vN(x,y) a via of type N, cw(c..) or ccw(c..) an arc to the next point about the centre after c; other vN are vias at no path point)
1.3V_TX: C94.1 C95.1 DA5.10 DA5.11 DA5.12 DA5.13 DA5.14 L7.2 L8.2 L9.1 L10.1 R26.1
1.3V_TX1B: C35.1 C37.1 DA1.M9 DA1.M10 L9.2 | length 1.1
  Top Layer w0.4: DA1.M9 v1(31.15,32.7) ; DA1.M10 v1(31.95,32.7)
1.3V_TX2B: C36.1 C38.1 DA1.A9 DA1.A10 L10.2 | length 1.1
  Top Layer w0.4: DA1.A9 v1(31.15,42.3) ; DA1.A10 v1(31.95,42.3)
1.3V_VDDA_BB: C44.1 C49.1 DA1.K4 L13.2 | length 0.6
  Top Layer w0.4: v1(26.35,34.3) DA1.K4
1.3V_VDDA_DIG: C45.1 C50.1 DA1.F12 L14.2 | length 0.6
  Top Layer w0.4: DA1.F12 v1(33.55,38.3)
1.3V_VDDA_MISC: C74.1 C76.1 DA3.10 DA3.11 DA3.12 DA3.13 DA3.14 L12.1 L13.1 L14.1 R20.1
1.3V_VDDA_OSC: C88.1 C89.1 DA4.10 DA4.11 DA4.12 DA4.13 DA4.14 L17.1 L18.1 L19.1 L20.1 R23.1
1.3V_VDDA_RX_LO: C56.1 C62.1 C68.1 DA1.E2 DA1.F2 L18.2 | length 1.1
  Top Layer w0.4: DA1.F2 v1(25.55,37.5) ; DA1.E2 v1(25.55,38.3)
1.3V_VDDA_RX_SYNTH: C57.1 C63.1 DA1.J3 L19.2 | length 0.6
  Top Layer w0.4: v1(25.55,35.1) DA1.J3
1.3V_VDDA_RX_TX: C43.1 C48.1 C53.1 C54.1 DA1.D2 DA1.D3 DA1.E3 L12.2 | length 1.7
  Top Layer w0.4: v1(24.75,39.9) DA1.D2 ; v1(25.55,39.1) DA1.E3 ; v1(25.55,39.9) DA1.D3
1.3V_VDDA_RX_VCO: C59.2 C65.2 DA1.G2 DA1.G3 | length 1.1
  Top Layer w0.4: DA1.G2 v1(25.55,36.7) ; DA1.G3 v1(26.35,37.5)
1.3V_VDDA_TX_LO: C55.1 C61.1 C67.1 DA1.B9 DA1.B10 L17.2 | length 1.1
  Top Layer w0.4: DA1.B9 v1(31.15,41.5) ; DA1.B10 v1(31.95,41.5)
1.3V_VDDA_TX_SYNTH: C58.1 C64.1 DA1.K3 L20.2 | length 0.6
  Top Layer w0.4: v1(25.55,34.3) DA1.K3
1.3V_VDDA_TX_VCO: C60.2 C66.2 DA1.A11 DA1.B11 | length 1.1
  Top Layer w0.4: DA1.B11 v1(32.75,41.5) ; DA1.A11 v1(32.75,42.3)
1.8V: C81.1 C83.1 C85.1 C87.1 L11.1 L15.1 L23.1 L24.2 L25.1
1.8V_VDD_INTERFACE: C46.1 C51.1 DA1.H12 L15.2 | length 0.6
  Top Layer w0.4: DA1.H12 v1(33.55,35.9)
3.3V: C20.1 C39.1 C40.1 L5.1 L6.2 L16.1 L21.1 R2.1 R5.1
3.3V_VDD_GPO: C47.1 C52.1 DA1.B8 L16.2 | length 0.6
  Top Layer w0.4: DA1.B8 v1(30.35,40.7)
AUX_ADC: C25.2 DA1.L5 | length 0.6
  Top Layer w0.2: v1(27.15,33.5) DA1.L5
AUX_DAC1: C33.1 DA1.B3 | length 0.6
  Top Layer w0.2: DA1.B3 v1(26.35,40.7)
AUX_DAC2: C34.1 DA1.C3 | length 0.6
  Top Layer w0.2: v1(25.55,40.7) DA1.C3
BUF_SD1: DA1.B6 DD1.12 | length 0.6
  Top Layer w0.2: v1(27.95,41.5) DA1.B6
BUF_SD2: DA1.B5 DD1.7 | length 0.6
  Top Layer w0.2: v1(27.15,41.5) DA1.B5
CLK_EXT_IN: C19.1 VD7.1 XW7.1
CLK_EXT_OUT: R10.2 R11.1 VD8.1 XW8.1
CLK_GEN_EN: DA1.B7 R4.1 | length 0.6
  Top Layer w0.2: v1(28.75,40.7) DA1.B7
CLK_OUT: DA1.J6 | length 0.6
  Top Layer w0.2: v1(27.95,35.1) DA1.J6
CLK_RF: C26.2 C27.1 C29.1 DA1.M12 | length 0.6
  Top Layer w0.2: DA1.M12 v1(33.55,32.7)
CTRL_IN0: DA1.C5 | length 0.6
  Top Layer w0.2: DA1.C5 v1(27.95,40.7)
CTRL_IN1: DA1.C6 | length 0.6
  Top Layer w0.2: DA1.C6 v1(28.75,39.9)
CTRL_IN2: DA1.D6 | length 0.6
  Top Layer w0.2: v1(27.95,39.9) DA1.D6
CTRL_IN3: DA1.D5 | length 0.6
  Top Layer w0.2: v1(27.15,39.9) DA1.D5
CTRL_OUT0: DA1.D4 | length 0.6
  Top Layer w0.2: v1(26.35,39.9) DA1.D4
CTRL_OUT1: DA1.E4 | length 0.6
  Top Layer w0.2: v1(26.35,39.1) DA1.E4
CTRL_OUT2: DA1.E5 | length 0.6
  Top Layer w0.2: v1(27.15,39.1) DA1.E5
CTRL_OUT3: DA1.E6 | length 0.6
  Top Layer w0.2: v1(27.95,39.1) DA1.E6
CTRL_OUT4: DA1.F6 | length 0.6
  Top Layer w0.2: v1(27.95,38.3) DA1.F6
CTRL_OUT5: DA1.F5 | length 0.6
  Top Layer w0.2: v1(27.15,38.3) DA1.F5
CTRL_OUT6: DA1.F4 | length 0.6
  Top Layer w0.2: DA1.F4 v1(27.15,37.5)
CTRL_OUT7: DA1.G4 | length 0.6
  Top Layer w0.2: v1(26.35,36.7) DA1.G4
DATA_CLK: DA1.H11 | length 0.6
  Top Layer w0.2: DA1.H11 v1(32.75,35.9)
EN_AGC: DA1.G5 | length 0.6
  Top Layer w0.2: v1(27.15,36.7) DA1.G5
ENABLE: DA1.G6 | length 0.6
  Top Layer w0.2: v1(27.95,36.7) DA1.G6
FB_CLK: DA1.F10 | length 0.6
  Top Layer w0.2: DA1.F10 v1(31.95,38.3)
GND: C9.2 C10.2 C11.2 C12.2 C13.2 C14.2 C20.2 C21.2 C22.2 C23.2 C24.2 C25.1 C27.2 C28.2 C30.2 C31.2 C32.2 C33.2 C34.2 C35.2 C36.2 C37.2 C38.2 C39.2 C40.2 C41.2 C42.2 C43.2 C44.2 C45.2 C46.2 C47.2 C48.2 C49.2 C50.2 C51.2 C52.2 C53.2 C54.2 C55.2 C56.2 C57.2 C58.2 C59.1 C60.1 C61.2 C62.2 C63.2 C64.2 C67.2 C68.2 C69.2 C70.2 C71.2 C72.2 C74.2 C75.2 C76.2 C77.2 C78.2 C79.2 C80.2 C81.2 C82.2 C83.2 C84.2 C85.2 C86.2 C87.2 C88.2 C89.2 C90.2 C91.2 C92.2 C93.2 C94.2 C95.2 DA1.A4 DA1.A6 DA1.A12 DA1.B1 DA1.B2 DA1.B12 DA1.C1 DA1.C2 DA1.C4 DA1.C7 DA1.C8 DA1.C9 DA1.C10 DA1.C11 DA1.C12 DA1.D1 DA1.D12 DA1.F3 DA1.F7 DA1.F9 DA1.F11 DA1.G1 DA1.G7 DA1.G11 DA1.G12 DA1.H2 DA1.H3 DA1.H5 DA1.H6 DA1.H7 DA1.H10 DA1.J2 DA1.K1 DA1.K2 DA1.K12 DA1.L1 DA1.L2 DA1.L3 DA1.L7 DA1.L8 DA1.L9 DA1.L10 DA1.L11 DA1.L12 DA1.M4 DA1.M6 DA2.2 DA3.6 DA3.PAD DA4.6 DA4.PAD DA5.6 DA5.PAD DD1.5 DD1.8 DD1.PAD G1.2 MH1.0 MH2.0 MH3.0 MH4.0 R3.2 R6.2 R9.2 R12.2 R13.2 R14.2 R15.1 R16.1 R19.2 R21.2 R24.2 R27.2 T1.1 T1.2 T1.5 T2.1 T2.2 T2.5 T3.1 T3.2 T3.5 T4.1 T4.2 T4.5 T5.1 T5.2 T5.5 T6.1 T6.2 T6.5 VD1.2 VD2.2 VD3.2 VD4.2 VD5.2 VD6.2 VD7.2 VD8.2 XW1.2 XW2.2 XW3.2 XW4.2 XW5.2 XW6.2 XW7.2 XW8.2 | length 26
  Top Layer w0.4: v1(23.784,37.1) DA1.G1 ; v1(23.95,33.5) DA1.L1 ; v1(23.95,34.3) DA1.K1 ; v1(23.95,39.9) DA1.D1 ; v1(23.95,40.7) DA1.C1 ; v1(23.95,41.5) DA1.B1 ; v1(24.75,33.5) DA1.L2 ; v1(24.75,34.3) DA1.K2 ; v1(24.75,35.1) DA1.J2 ; v1(24.75,35.9) DA1.H2 ; v1(24.75,40.7) DA1.C2 ; v1(24.75,41.5) DA1.B2 ; v1(25.55,33.5) DA1.L3 ; v1(25.55,35.9) DA1.H3 ; DA1.F3 v1(26.35,38.3) ; v1(26.35,32.7) DA1.M4 ; v1(26.35,42.3) DA1.A4 ; DA1.C4 v1(27.15,40.7) ; v1(27.15,35.9) DA1.H5 ; v1(27.95,32.7) DA1.M6 ; v1(27.95,35.9) DA1.H6 ; v1(27.95,42.3) DA1.A6 ; DA1.L7 v1(29.55,33.5) ; DA1.H7 v1(29.55,35.9) ; DA1.G7 v1(29.55,36.7) ; DA1.F7 v1(29.55,38.3) ; DA1.C7 v1(29.55,40.7) ; v1(29.55,39.9) DA1.C8 ; DA1.L8 v1(30.35,33.5) ; DA1.L9 v1(31.15,33.5) ; DA1.F9 v1(31.15,38.3) ; DA1.C9 v1(31.15,40.7) ; DA1.L10 v1(31.95,33.5) ; DA1.H10 v1(31.95,35.9) ; DA1.C10 v1(31.95,40.7) ; DA1.L11 v1(32.75,33.5) ; DA1.G11 v1(32.75,36.7) ; DA1.F11 v1(32.75,38.3) ; DA1.C11 v1(32.75,40.7) ; DA1.L12 v1(33.55,33.5) ; DA1.K12 v1(33.55,34.3) ; DA1.G12 v1(33.55,36.7) ; DA1.D12 v1(33.55,39.9) ; DA1.C12 v1(33.55,40.7) ; DA1.B12 v1(33.55,41.5) ; DA1.A12 v1(33.55,42.3)
GPO_3: DA1.B4 | length 0.6
  Top Layer w0.2: v1(26.35,41.5) DA1.B4
NetC9_1: C9.1 C11.1 C13.1 L1.2 L3.2 L7.1
NetC10_1: C10.1 C12.1 C14.1 L2.2 L4.2 L8.1
NetC19_2: C19.2 R1.1 R7.1
NetC21_1: C21.1 C23.1 G1.4 L5.2
NetC22_1: C22.1 DD1.4 R1.2
NetC24_1: C24.1 G1.1 R4.2
NetC26_1: C26.1 G1.3
NetC28_1: C28.1 C30.1 C31.1 DD1.2 DD1.11 L6.1
NetC29_2: C29.2 R8.2 R9.1
NetC32_1: C32.1 R11.2
NetC41_1: C41.1 C42.1 C70.1 DA3.1 DA3.2 DA3.3 DA3.4 DA3.15 DA3.16 L11.2 R17.1
NetC65_1: C65.1 R15.2
NetC66_1: C66.1 R16.2
NetC69_1: C69.1 C71.1 DA2.1 DA2.4 L21.2
NetC72_1: C72.1 DA3.7
NetC73_1: C73.1 C75.1 C77.1 C78.1 C79.1 L22.2 L24.1 R18.1
NetC73_2: C73.2 DA2.6 R18.2 R19.1
NetC80_1: C80.1 C82.1 C84.1 DA4.1 DA4.2 DA4.3 DA4.4 DA4.15 DA4.16 L23.2 R22.1
NetC86_1: C86.1 DA4.7
NetC90_1: C90.1 C91.1 C92.1 DA5.1 DA5.2 DA5.3 DA5.4 DA5.15 DA5.16 L25.2 R25.1
NetC93_1: C93.1 DA5.7
NetDA2_3: DA2.3 L22.1
NetDA3_5: DA3.5 R17.2
NetDA3_9: DA3.9 R20.2 R21.1
NetDA4_5: DA4.5 R22.2
NetDA4_9: DA4.9 R23.2 R24.1
NetDA5_5: DA5.5 R25.2
NetDA5_9: DA5.9 R26.2 R27.1
NetDD1_1: DD1.1 R2.2 R3.1
NetDD1_3: DD1.3 R7.2
NetDD1_6: DD1.6 R5.2 R6.1
NetDD1_9: DD1.9 R10.1
NetDD1_10: DD1.10 R8.1
nRESET: DA1.K5 | length 0.6
  Top Layer w0.2: v1(27.15,34.3) DA1.K5
nSPI_EN: DA1.K6 | length 0.6
  Top Layer w0.2: v1(27.95,34.3) DA1.K6
RBIAS: DA1.L4 R14.1 | length 0.6
  Top Layer w0.2: v1(26.35,33.5) DA1.L4
RX1_A: T1.3 VD1.1 XW1.1
RX1_A_AC_N: C1.2 DA1.M2 | length 1.3
  Top Layer w0.2: C1.2 cw(c24.456,25.769) 24.456,26.025 25.525,26.025
RX1_A_AC_P: C5.2 DA1.M1 | length 1.3
  Top Layer w0.2: C5.2 ccw(c24.456,26.731) 24.456,26.475 25.525,26.475
RX1_A_DC_N: C1.1 T1.6 | length 2
  Top Layer w0.2: T1.6 22.508,24.98 22.676,25.148 C1.1
RX1_A_DC_P: C5.1 T1.4 | length 2
  Top Layer w0.2: T1.4 22.508,27.52 22.676,27.352 C5.1
RX1_B: T2.3 VD2.1 XW2.1
RX1_B_AC_N: C2.2 DA1.J1
RX1_B_AC_P: C6.2 DA1.H1
RX1_B_DC_N: C2.1 T2.6
RX1_B_DC_P: C6.1 T2.4
RX2_A: T3.3 VD3.1 XW3.1
RX2_A_AC_N: C3.2 DA1.A1 | length 1.3
  Top Layer w0.2: C3.2@22.42,45.486 cw(c22.375,45.233) 22.585,45.38 23.198,44.505
RX2_A_AC_P: C7.2 DA1.A2 | length 1.3
  Top Layer w0.2: C7.2@22.911,45.83 ccw(c23.163,45.785) 22.953,45.638 23.567,44.763
RX2_A_DC_N: C3.1 T3.6 | length 2
  Top Layer w0.2: T3.6 20.612,46.376 20.846,46.335 C3.1@22.104,45.936
RX2_A_DC_P: C7.1 T3.4 | length 2
  Top Layer w0.2: T3.4 22.692,47.833 22.651,47.599 C7.1@22.596,46.28
RX2_B: T4.3 VD4.1 XW4.1
RX2_B_AC_N: C4.2 DA1.F1
RX2_B_AC_P: C8.2 DA1.E1
RX2_B_DC_N: C4.1 T4.6
RX2_B_DC_P: C8.1 T4.4
RX_D0: DA1.K11 | length 0.6
  Top Layer w0.2: DA1.K11 v1(32.75,34.3)
RX_D1: DA1.J12 | length 0.6
  Top Layer w0.2: DA1.J12 v1(33.55,35.1)
RX_D2: DA1.K10 | length 0.6
  Top Layer w0.2: DA1.K10 v1(31.95,34.3)
RX_D3: DA1.J11 | length 0.6
  Top Layer w0.2: DA1.J11 v1(32.75,35.1)
RX_D4: DA1.K9 | length 0.6
  Top Layer w0.2: DA1.K9 v1(31.15,34.3)
RX_D5: DA1.J10 | length 0.6
  Top Layer w0.2: DA1.J10 v1(31.95,35.1)
RX_D6: DA1.K8 | length 0.6
  Top Layer w0.2: DA1.K8 v1(30.35,34.3)
RX_D7: DA1.J9 | length 0.6
  Top Layer w0.2: DA1.J9 v1(31.15,35.1)
RX_D8: DA1.K7 | length 0.6
  Top Layer w0.2: DA1.K7 v1(29.55,34.3)
RX_D9: DA1.J8 | length 0.6
  Top Layer w0.2: DA1.J8 v1(30.35,35.1)
RX_D10: DA1.J7 | length 0.6
  Top Layer w0.2: DA1.J7 v1(29.55,35.1)
RX_D11: DA1.H8 | length 0.6
  Top Layer w0.2: DA1.H8 v1(30.35,35.9)
RX_FRAME: DA1.G8 | length 0.6
  Top Layer w0.2: DA1.G8 v1(30.35,36.7)
SPI_MISO: DA1.L6 | length 0.6
  Top Layer w0.2: v1(27.95,33.5) DA1.L6
SPI_MOSI: DA1.J4 | length 0.6
  Top Layer w0.2: v1(26.35,35.1) DA1.J4
SPI_SCLK: DA1.J5 | length 0.6
  Top Layer w0.2: v1(27.15,35.1) DA1.J5
TX1_A: T5.3 VD5.1 XW5.1
TX1_A_AC_N: C17.2 DA1.M8 L1.1
TX1_A_AC_P: C15.2 DA1.M7 L3.1
TX1_A_DC_N: C17.1 T5.6
TX1_A_DC_P: C15.1 T5.4
TX2_A: T6.3 VD6.1 XW6.1
TX2_A_AC_N: C18.2 DA1.A7 L2.1
TX2_A_AC_P: C16.2 DA1.A8 L4.1
TX2_A_DC_N: C18.1 T6.6
TX2_A_DC_P: C16.1 T6.4
TX_D0: DA1.E12 | length 0.6
  Top Layer w0.2: DA1.E12 v1(33.55,39.1)
TX_D1: DA1.D11 | length 0.6
  Top Layer w0.2: DA1.D11 v1(32.75,39.9)
TX_D2: DA1.E11 | length 0.6
  Top Layer w0.2: DA1.E11 v1(32.75,39.1)
TX_D3: DA1.D10 | length 0.6
  Top Layer w0.2: DA1.D10 v1(31.95,39.9)
TX_D4: DA1.E10 | length 0.6
  Top Layer w0.2: DA1.E10 v1(31.95,39.1)
TX_D5: DA1.D9 | length 0.6
  Top Layer w0.2: DA1.D9 v1(31.15,39.9)
TX_D6: DA1.E9 | length 0.6
  Top Layer w0.2: DA1.E9 v1(31.15,39.1)
TX_D7: DA1.D8 | length 0.6
  Top Layer w0.2: DA1.D8 v1(30.35,39.9)
TX_D8: DA1.E8 | length 0.6
  Top Layer w0.2: DA1.E8 v1(30.35,39.1)
TX_D9: DA1.D7 | length 0.6
  Top Layer w0.2: v1(28.75,39.1) DA1.D7
TX_D10: DA1.F8 | length 0.6
  Top Layer w0.2: DA1.F8 v1(30.35,38.3)
TX_D11: DA1.E7 | length 0.6
  Top Layer w0.2: DA1.E7 v1(29.55,39.1)
TX_FRAME: DA1.G9 | length 0.6
  Top Layer w0.2: DA1.G9 v1(31.15,36.7)
TX_MON1: DA1.M5 R12.1 | length 0.6
  Top Layer w0.2: v1(27.15,32.7) DA1.M5
TX_MON2: DA1.A5 R13.1 | length 0.6
  Top Layer w0.2: v1(27.15,42.3) DA1.A5
TXNRX: DA1.H4 | length 0.6
  Top Layer w0.2: v1(26.35,35.9) DA1.H4
pads on no net: DA1.A3 DA1.G10 DA1.H9 DA1.M3 DA1.M11 DA3.8 DA4.8 DA5.8 XP1.1 XP1.2 XP1.3 XP1.4 XP1.5 XP1.6 XP1.7 XP1.8 XP1.9 XP1.10 XP1.11 XP1.12 XP1.13 XP1.14 XP1.15 XP1.16 XP1.17 XP1.18 XP1.19 XP1.20 XP1.21 XP1.22 XP1.23 XP1.24 XP1.25 XP1.26 XP1.27 XP1.28 XP1.29 XP1.30 XP1.31 XP1.32 XP1.33 XP1.34 XP1.35 XP1.36 XP1.37 XP1.38 XP1.39 XP1.40 XP1.41 XP1.42 XP1.43 XP1.44 XP1.45 XP1.46 XP1.47 XP1.48 XP1.49 XP1.50 XP1.51 XP1.52 XP1.53 XP1.54 XP1.55 XP1.56 XP1.57 XP1.58 XP1.59 XP1.60 XP1.SHLD

## Keep-outs
Keep-Out Layer:
  the board outline again, w0.2

## Other copper
Top Layer:
  text "RXTX SDR" at 24.843,-66.601 h1.52

## Silkscreen, mask and mechanical layers (free items; w line width, h text height)
Bottom Overlay:
  drawing of 82 lines, arcs and shapes, not listed
Top Solder:
  rectangle: 24.7,-66.7 29.9,-65.5
Mechanical 1:
  lines w1: 12.5,20 12.5,55 37.5,55 37.5,20 12.5,20